# Altium PCB PCB.PcbDoc
Units mm, origin at the board's own origin, x right, y up, seen from the top; angles counter-clockwise.
Board outline 65 x 50 mm, 2 copper layers (Top Layer, Bottom Layer); 102 components, 99 nets, 372 pads, 9 vias.
Unrouted connection lines stored in the file: 148.
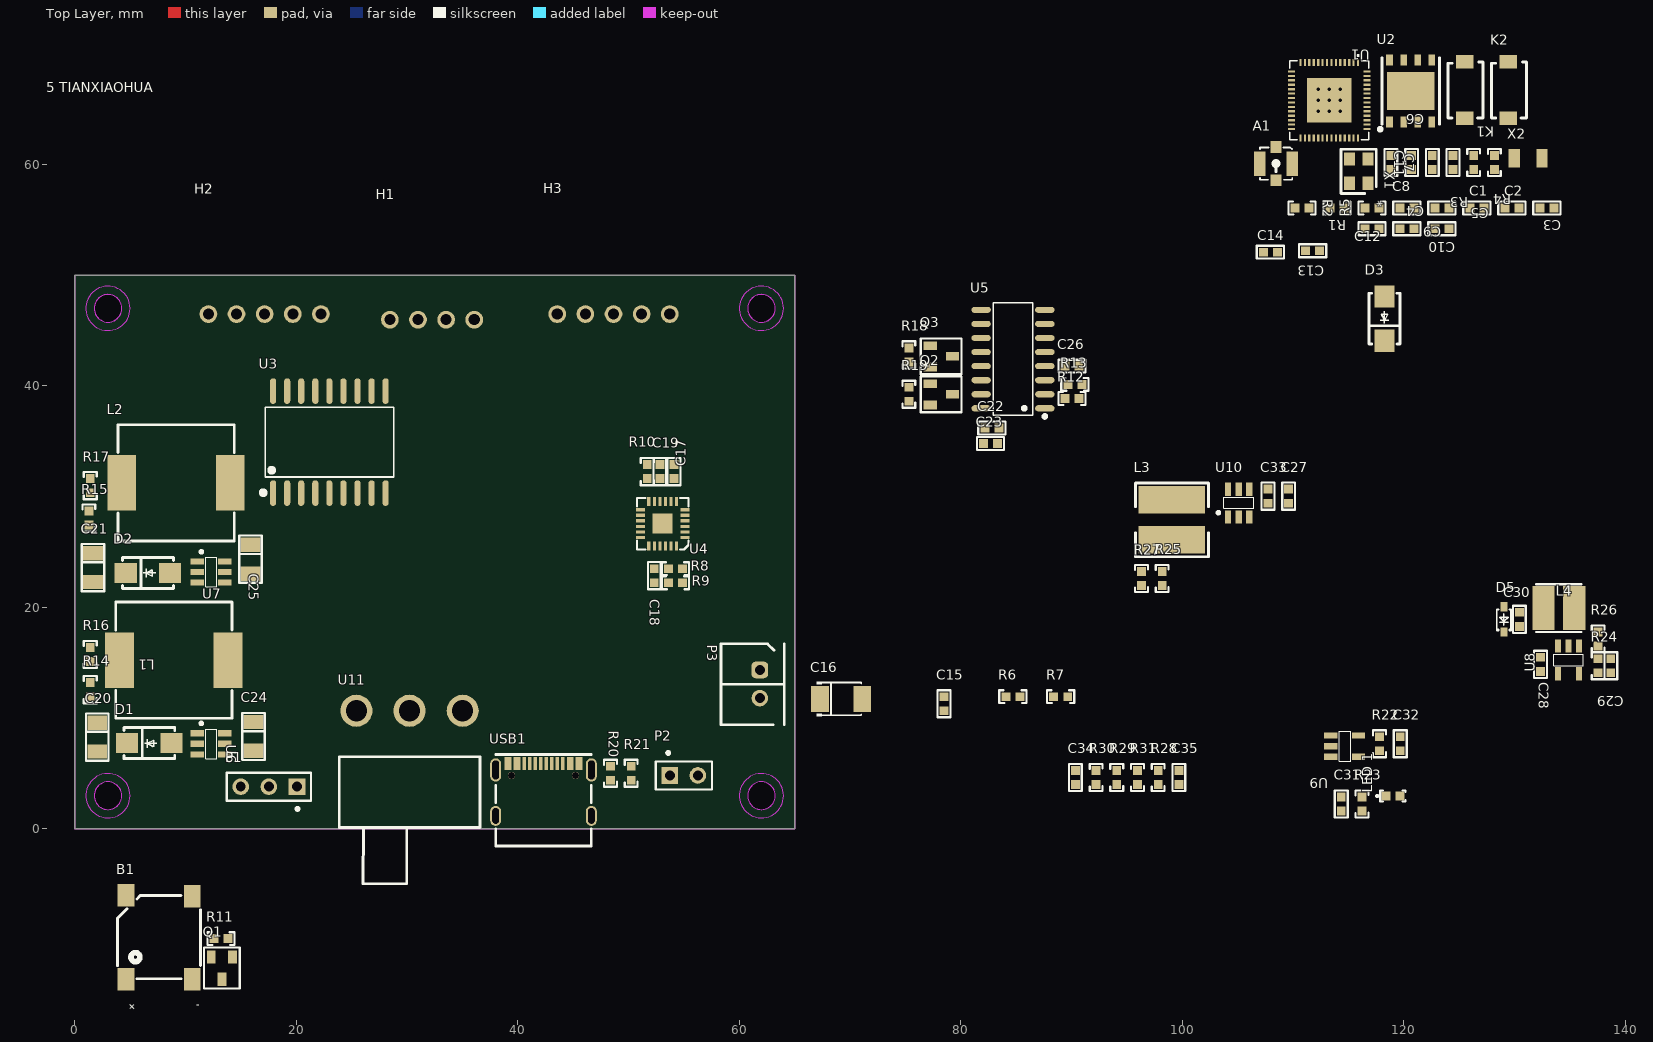
[diagram p0: Top Layer view]
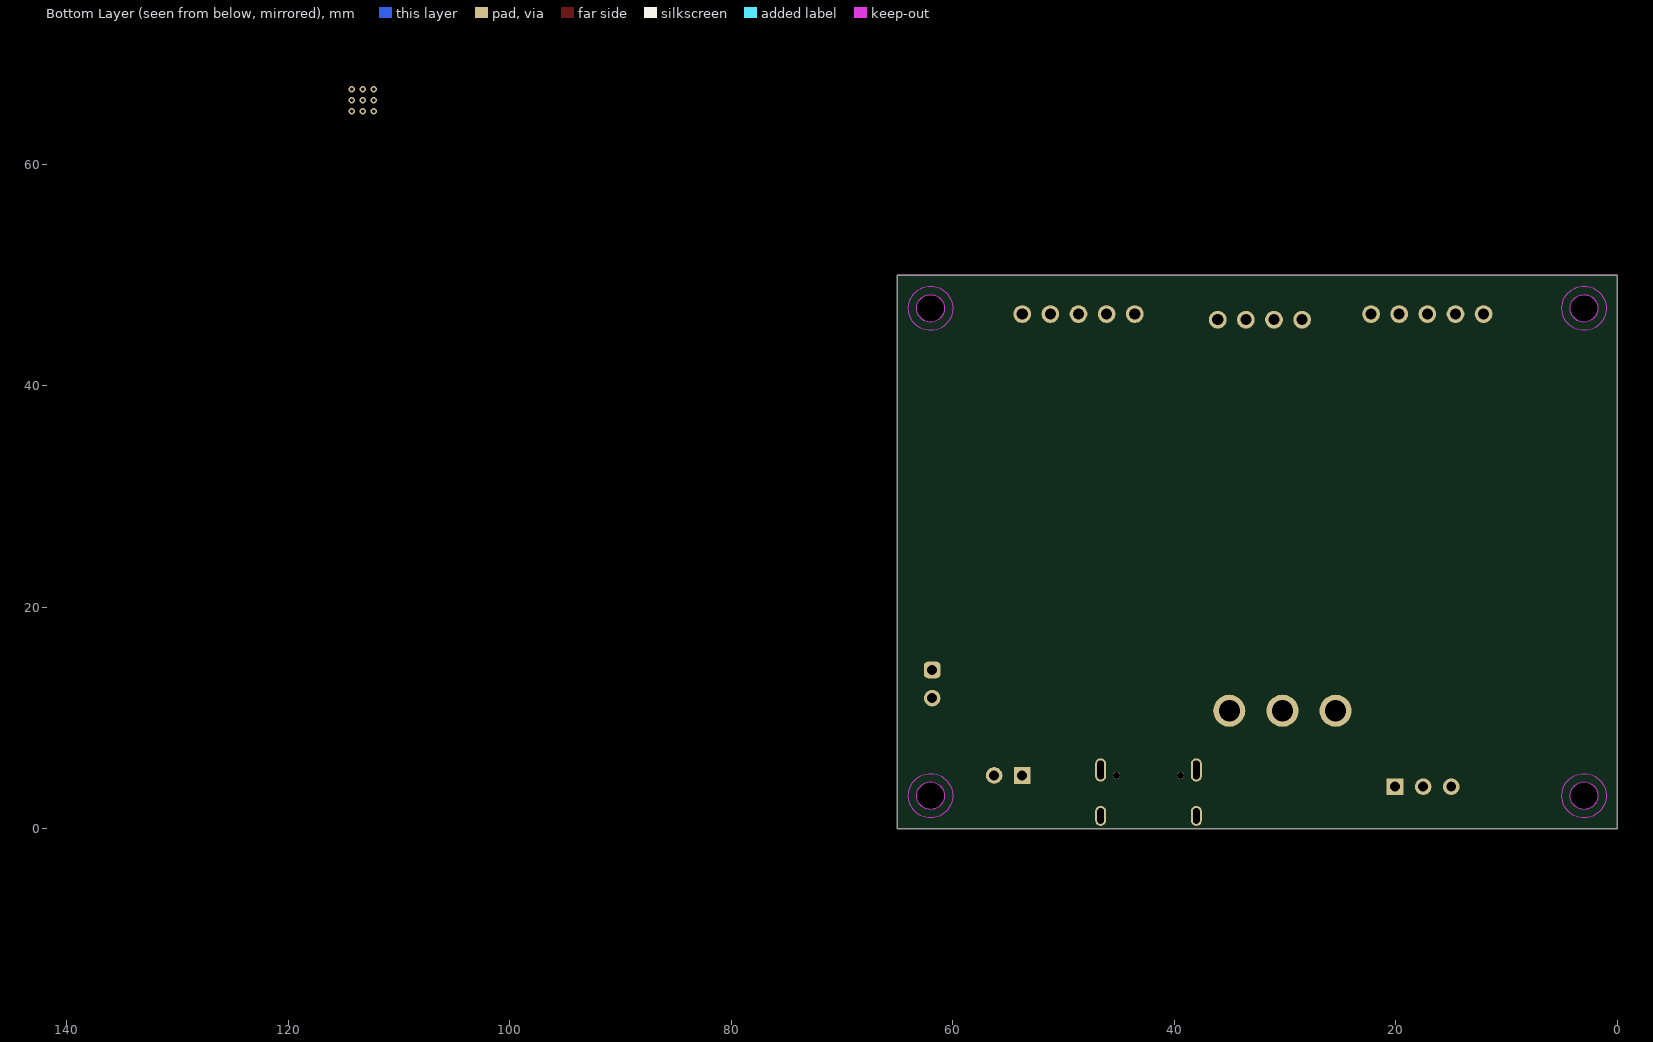
[diagram p1: Bottom Layer view, seen from below]

## Layer stack, top to bottom
Top Solder: solder mask 0.0102, Solder Resist, Dk 3.5
Top Layer: signal copper 0.0356
Dielectric 1: dielectric 0.32, FR-4, Dk 4.8
Bottom Layer: signal copper 0.0356
Bottom Solder: solder mask 0.0102, Solder Resist, Dk 3.5

## Board outline
0,0 0,50 65,50 65,0
cut-out: 60.75,47 ccw(c62,47) 62,45.75 ccw(c62,47) 63.25,47 ccw(c62,47) 62,48.25 ccw(c62,47)
cut-out: 60.75,3 ccw(c62,3) 62,1.75 ccw(c62,3) 63.25,3 ccw(c62,3) 62,4.25 ccw(c62,3)
cut-out: 60.75,3 ccw(c62,3) 62,1.75 ccw(c62,3) 63.25,3 ccw(c62,3) 62,4.25 ccw(c62,3)
cut-out: 60.75,3 ccw(c62,3) 62,1.75 ccw(c62,3) 63.25,3 ccw(c62,3) 62,4.25 ccw(c62,3)
cut-out: 1.75,3 ccw(c3,3) 3,1.75 ccw(c3,3) 4.25,3 ccw(c3,3) 3,4.25 ccw(c3,3)
cut-out: 1.75,47 ccw(c3,47) 3,45.75 ccw(c3,47) 4.25,47 ccw(c3,47) 3,48.25 ccw(c3,47)

## Design rules (kind name [scope] priority, off if disabled: settings)
Clearance [All] p1: gap=0.1 ignorepadtopadclearanceinfootprint=FALSE except(0: Arc-Hole Track-Hole SMDPad-Hole THPad-Hole Via-Hole Fill-Hole Poly-Hole Region-Hole Text-Hole; 0.102: Arc-Arc Arc-Track Arc-SMDPad Arc-THPad Track-Track Track-SMDPad Track-THPad SMDPad-SMDPad SMDPad-THPad THPad-THPad; 0.127: Arc-Via Track-Via SMDPad-Via SMDPad-Text THPad-Via Via-Via; 0.254: Arc-Text Track-Text THPad-Text Via-Text Fill-Text Poly-Text Region-Text Text-Text)
DiffPairsRouting [All] p1: maxlimit=0.254 minlimit=0.254 mostfreqgap=0.254 toplayer_minwidth=0.381 toplayer_maxwidth=0.381 toplayer_prefwidth=0.381 bottomlayer_minwidth=0.381 bottomlayer_maxwidth=0.381 bottomlayer_prefwidth=0.381 maxuncoupledlength=12.7
HoleSize [All] p1: absolutevalues=TRUE maxlimit=30 minlimit=0.025 maxpercent=80.000 minpercent=20.000
HoleToHoleClearance [All] p1: gap=0.152 allowstackedmicrovias=TRUE
MinimumSolderMaskSliver [All] p1: minsoldermaskwidth=0
PlaneClearance [All] p1: clearance=0.254
PlaneConnect [All] p1: planeconnectstyle=Direct reliefexpansion=0.508 reliefentries=4 reliefconductorwidth=0.254 reliefairgap=0.254
PolygonConnect [All] p1: connectstyle=Direct reliefconductorwidth=0.254 reliefentries=4 polygonreliefangle="90 Angle" airgapwidth=0.254
RoutingVias [All] p1: holewidth=0.711 width=1.27 viastyle="Through Hole" minholewidth=0.3 minwidth=0.5 maxholewidth=30 maxwidth=30
SilkToSilkClearance [All] p1: silktosilkclearance=0
SilkToSolderMaskClearance [IsPad] p1: minsilkscreentomaskgap=0 clearancetoexposedcopper=TRUE
SolderMaskExpansion [All] p1: expansion=0.102 istentingtop=FALSE
Width [All] p1: maxlimit=3 minlimit=0.1 preferedwidth=0.254
22 further rules are at their usual default settings.

## Classes and differential pairs
component class Sheet3-USB: C20 C21 C22 C23 C24 C25 C26 C27 C28 C29 C30 C31 C32 C33 C34 C35 D1 D2 D3 D5 L1 L2 L3 L4 "LED 1" P3 Q2 Q3 R12 R13 R14 R15 R16 R17 R18 R19 R20 R21 R22 R23 R24 R25 R26 R27 R28 R29 R30 R31 U5 U6 U7 U8 U9 U10 U11 USB1
component class Sheet2-control: B1 C15 C16 C17 C18 C19 H1 H2 H3 P1 P2 Q1 R6 R7 R8 R9 R10 R11 U3 U4
component class Sheet1-MCU: A1 C1 C2 C3 C4 C5 C6 C7 C8 C9 C10 C11 C12 C13 C14 K1 K2 R1 R2 R3 R4 R5 U1 U2 X1 X2
differential pair USB: +USB_P -USB_N
differential pair IO: +IO_P -IO_N
differential pair CH340: +CH340_P -CH340_N

## Components (designator, comment, footprint, x,y, rotation, side; value= is the part's Value field where it differs from the comment)
A1 "ANT-IPEX" IPEX-SMD_HC-RF-IPEX0303-01 108.458,60.071 r0 top
B1 "BUZZER1" BUZ-SMD_GSC7525RA 7.61,-9.779 r90 top
C1 "15pF" CC1608-0603 126.594,56.058 r180 top
C2 "15pF" CC1608-0603 129.753,56.058 r180 top
C3 "1uF" CC1608-0603 132.912,56.058 r0 top
C4 "100nF" CC1608-0603 123.435,56.058 r0 top
C5 "1uF" CC1608-0603 124.435,60.163 r270 top
C6 "100nF" CC1608-0603 122.566,60.163 r270 top
C7 "100nF" CC1608-0603 118.828,60.163 r90 top
C8 "12.5pF" CC1608-0603 120.276,56.058 r0 top
C9 "12.5pF" CC1608-0603 120.276,54.189 r0 top
C10 "100NF" CC1608-0603 123.435,54.189 r0 top
C11 "100NF" CC1608-0603 120.697,60.163 r270 top
C12 "1uF" CC1608-0603 117.117,54.189 r0 top
C13 "100NF" CC1608-0603 111.76,52.197 r180 top
C14 "1uF/NC" CC1608-0603 107.95,52.07 r0 top
C15 "100NF 50V" CC1608-0603 78.476,11.303 r90 top
C16 "100uF" TAN-B_3528 69.205,11.811 r0 top
C17 "100NF 50V" CC1608-0603 54.102,32.258 r270 top
C18 "2.2UF" CC1608-0603 52.324,22.86 r270 top
C19 "100NF" CC1608-0603 52.832,32.258 r270 top
C20 "22uF" TAN-A-1206 2.032,8.319 r270 top
C21 "22uF" TAN-A-1206 1.651,23.622 r270 top
C22 "1uF" CC1608-0603 82.804,36.195 r180 top
C23 "100NF" CC1608-0603 82.677,34.798 r180 top
C24 "22uF" TAN-A-1206 16.129,8.382 r270 top
C25 "22uF" TAN-A-1206 15.875,24.384 r270 top
C26 "100NF" CC1608-0603 90.043,41.783 r180 top
C27 "22uF" CC1608-0603 109.597,30.044 r90 top
C28 "10uF" CC1608-0603 132.334,14.859 r270 top
C29 "22PF" CC1608-0603 138.684,14.732 r270 top
C30 "10uF" CC1608-0603 130.429,18.923 r270 top
C31 "1uF" CC1608-0603 114.345,2.254 r90 top
C32 "100NF" CC1608-0603 119.671,7.692 r90 top
C33 "22uF" CC1608-0603 107.728,30.044 r90 top
C34 "100NF" CC1608-0603 90.342,4.644 r90 top
C35 "100NF" CC1608-0603 99.687,4.644 r90 top
D1 "SS34" "DO-214 AA" 6.731,7.747 r0 top
D2 "SS34" "DO-214 AA" 6.604,23.114 r0 top
D3 "SS34" "DO-214 AA" 118.237,46.069 r90 top
D5 "PESD3V3L1BA" SOD-323 129.032,18.923 r90 top
H1 "Header_4P_Curved" Header_2_54_4PW 36.068,45.974 r180 top
H2 "Header_5P_Curved" Header_2_54_5PW 22.225,46.482 r180 top
H3 "Header_5P_Curved" Header_2_54_5PW 53.721,46.482 r180 top
K1 "KEY 3*4" "KEY 3*4" 125.498,64.175 r90 top
K2 "KEY 3*4" "KEY 3*4" 129.435,64.175 r90 top
L1 "22UH" CDRH104R 8.943,15.24 r180 top
L2 "22UH" CDRH104R 9.144,31.242 r180 top
L3 "10uH" Inductor-6045 99.06,29.718 r0 top
L4 "1uH" Inductor-4018 133.985,19.939 r180 top
"LED 1" "LED 0603" "LED 0603" 119.013,2.971 r180 top
P1 "Header 3" HDR1X3 20.066,3.81 r180 top
P2 "Header 2" HDR1X2 53.721,4.826 r0 top
P3 "Header 2" HX2.54-2 61.849,14.351 r270 top
Q1 "SI2302" SOT-23 14.234,-11.557 r180 top
Q2 "S8050" SOT-23 77.228,40.193 r270 top
Q3 "S8050" SOT-23 77.228,43.622 r270 top
R1 "1.5K" CR1608-0603 113.958,56.058 r0 top
R2 "0R" CR1608-0603 110.799,56.058 r180 top
R3 "0R" CR1608-0603 126.304,60.163 r270 top
R4 "10K/NC" CR1608-0603 128.173,60.163 r270 top
R5 "10K" CR1608-0603 117.117,56.058 r0 top
R6 "2K" CR1608-0603 84.699,11.938 r0 top
R7 "2K" CR1608-0603 89.017,11.938 r0 top
R8 "2K" CR1608-0603 54.229,23.495 r0 top
R9 "2K" CR1608-0603 54.229,22.225 r0 top
R10 "4.7K" CR1608-0603 51.689,32.258 r270 top
R11 "33KR" CR1608-0603 13.208,-9.906 r180 top
R12 "470R" CR1608-0603 90.043,38.862 r0 top
R13 "470R" CR1608-0603 90.297,40.132 r0 top
R14 "33KR" CR1608-0603 1.397,12.573 r90 top
R15 "33KR" CR1608-0603 1.27,28.067 r90 top
R16 "2KR" CR1608-0603 1.397,15.748 r90 top
R17 "2KR" CR1608-0603 1.397,30.988 r90 top
R18 "12K/10K" CR1608-0603 75.311,42.799 r270 top
R19 "12K/10K" CR1608-0603 75.311,39.243 r90 top
R20 "5.1K" CR1608-0603 48.37,5.025 r270 top
R21 "5.1K" CR1608-0603 50.239,5.025 r90 top
R22 "1K" CR1608-0603 117.802,7.692 r90 top
R23 "2K" CR1608-0603 116.214,2.254 r90 top
R24 "100K" CR1608-0603 137.541,14.732 r90 top
R25 "78.7KR" CR1608-0603 98.18,22.614 r90 top
R26 "22.1K" CR1608-0603 137.541,17.145 r90 top
R27 "10KR" CR1608-0603 96.311,22.614 r90 top
R28 "10K" CR1608-0603 97.818,4.644 r90 top
R29 "10K" CR1608-0603 94.08,4.644 r90 top
R30 "10K" CR1608-0603 92.211,4.644 r90 top
R31 "10K" CR1608-0603 95.949,4.644 r90 top
U1 "ESP32-S3" QFN-56 113.265,65.787 r270 top
U2 "W25Q64JVPIQ" WSON-8 120.612,66.626 r0 top
U3 "ULN2803A-DWM" SOP-18 22.987,34.925 r0 top
U4 "MPU6050" "QFN24 - duplicate" 53.086,27.559 r180 top
U5 "CH340C" SOP-16 84.709,42.418 r90 top
U6 "MT3608" SOT23-6 12.319,7.747 r270 top
U7 "MT3608" SOT23-6 12.319,23.241 r270 top
U8 "SY8089A1AAC" SOT23-5 133.919,16.51 r0 top
U9 "TP4054" SOT23-5 113.412,6.512 r90 top
U10 "SX1308" SOT23-6 105.029,29.437 r0 top
U11 "HX SS12D10G4" SW-TH_3P-SS12D06 30.226,10.668 r0 top
USB1 "Tpye-c 16P" "TYPE-C 16P" 45.212,4.826 r0 top
X1 "3225_40M" XTAL-3225 115.074,58.288 r90 top
X2 "32.768kKHz" XTAL-3215 129.963,60.562 r0 top

## Footprints (in the part's own frame and the unit in brackets; to place one, negate y for a bottom-side part, rotate by r counter-clockwise, add the part's x,y. Pads: shape width x height; smd on the part's side, far side on the other; paste and mask are expansions set on the pad)
BUZ-SMD_GSC7525RA [mm]
  rect 2x1.5 smd paste+0 mask+0.051: 1(-3.795,2.98) 2(-3.795,-2.98) 3(3.705,-2.98) 3(3.795,2.98)
  silkscreen extent -3.75,-3.75 3.76,3.76, body extent -3.81,-3.81 3.69,3.69, height 2.5
CC1608-0603 [mm]
  rect 0.8x0.8 smd: 1(-0.635,0) 2(0.635,0)
  silkscreen extent -1.23,-0.58 1.23,0.58, body extent -0.8,-0.4 0.8,0.4, height 0.3
CDRH104R [mm]
  rect 2.6x5 smd paste+0 mask+0.05: 1(-4.9,0) 2(4.9,0)
  silkscreen extent -5.25,-5.25 5.25,5.25, body extent -5.19,-5.14 5.31,5.16, height 4
CR1608-0603 [mm]
  rect 0.8x0.8 smd: 1(-0.635,0) 2(0.635,0)
  silkscreen extent -1.23,-0.58 1.23,0.58, body extent -0.8,-0.4 0.8,0.4, height 0.45
"DO-214 AA" [mm] "SMB"
  rect 2x1.8 smd: 1(-2,0) 2(2,0)
  silkscreen extent -2.3,-1.4 2.3,1.4, body extent -2.83,-1.8 2.57,1.8, height 2.4
HDR1X2 [mm] "Connector; Header; 2 Position"
  rect 1.5x1.5 hole 0.9: 1(0,0)
  round 1.5 hole 0.9: 2(2.54,0)
  silkscreen extent -1.27,-1.27 3.81,2.17, body extent -1.27,-1.27 3.81,1.27, height 8.54
HDR1X3 [mm] "Connector; Header; 3 Position"
  rect 1.5x1.5 hole 0.9: 1(0,0)
  round 1.5 hole 0.9: 2(2.54,0) 3(5.08,0)
  silkscreen extent -1.27,-1.27 6.35,2.14, body extent -1.27,-1.27 6.35,1.27, height 8.54
Header_2_54_4PW [mm] "3P弯针"
  round 1.6 hole 1: 1(0,0) 2(2.54,0) 3(5.08,0) 4(7.62,0)
  body extent -1.27,-10.07 8.89,0.26, height 2.75
Header_2_54_5PW [mm] "6P弯针"
  round 1.6 hole 1: 1(0,0) 2(2.54,0) 3(5.08,0) 4(7.62,0) 5(10.16,0)
  body extent -1.27,-10.07 11.43,0.25, height 2.75
HX2.54-2 [mm] "两针白色插座（已加焊）"
  rrect50% 1.5x1.5 hole 0.9: 1(0,0)
  round 1.5 hole 0.9: 2(2.54,0)
  silkscreen extent -2.36,-3.5 4.94,2.2, body extent -2.48,-3.55 5.02,2.45, height 7
Inductor-4018 [mm]
  rect 2x4 smd paste+0 mask+0.051: 1(-1.397,0) 2(1.373,0)
  silkscreen extent -2.03,-2.16 2.03,2.16, body extent -2,-2 2,2, height 1.8
Inductor-6045 [mm] "电感"
  rect 6x2.5 smd: 1(0,0) 2(0,-3.6)
  silkscreen extent -3.3,-5.14 3.3,1.52, body extent -3,-4.93 3,1.37, height 4.5
IPEX-SMD_HC-RF-IPEX0303-01 [mm] "孔径2.0mm"
  rect 1x1.05 smd: 1(0,-1.5) 4(0,1.5)
  rect 1.05x2.2 smd: 2(1.475,0) 3(-1.475,0)
  silkscreen extent -1.45,-1.45 1.45,1.45, body extent -1.5,-1.55 1.5,1.55, height 1.25
"KEY 3*4" [mm]
  rect 1.2x1.6 smd: 1(0,0) 2(5.1,0)
  silkscreen extent 0,-1.65 5.08,1.52, body extent 0.25,-1.71 4.7,1.46, height 2.01
"LED 0603" [mm]
  rect 0.8x0.8 smd: 1(-0.635,0) 2(0.635,0)
  silkscreen extent -1.14,-0.51 1.48,0.51, body extent -0.8,-0.4 0.8,0.4, height 0.6
"QFN24 - duplicate" [mm]
  rect 0.8x0.3 smd: 1(-2,1.25) 2(-2,0.75) 3(-2,0.25) 4(-2,-0.25) 5(-2,-0.75) 6(-2,-1.25) 13(2,-1.25) 14(2,-0.75) 15(2,-0.25) 16(2,0.25) 17(2,0.75) 18(2,1.25)
  rect 1.8x1.8 smd: 1(0.005,0)
  rect 0.3x0.8 smd: 7(-1.25,-2) 8(-0.75,-2) 9(-0.25,-2) 10(0.25,-2) 11(0.75,-2) 12(1.25,-2) 19(1.25,2) 20(0.75,2) 21(0.25,2) 22(-0.25,2) 23(-0.75,2) 24(-1.25,2)
  silkscreen extent -2.32,-2.32 2.32,2.32, body extent -2,-2 2.01,2, height 0.9
QFN-56 [mm]
  rect 0.665x0.2 smd paste-100 mask+0.051: 1(-3.407,2.6) 2(-3.407,2.2) 3(-3.407,1.8) 4(-3.407,1.4) 5(-3.407,1) 6(-3.407,0.6) 7(-3.407,0.2) 8(-3.407,-0.2) 9(-3.407,-0.6) 10(-3.407,-1) 11(-3.407,-1.4) 12(-3.407,-1.8) 13(-3.407,-2.2) 14(-3.407,-2.6) 29(3.408,-2.6) 30(3.408,-2.2) 31(3.408,-1.8) 32(3.408,-1.4) 33(3.408,-1) 34(3.408,-0.6) 35(3.408,-0.2) 36(3.408,0.2) 37(3.408,0.6) 38(3.408,1) 39(3.408,1.4) 40(3.408,1.8) 41(3.408,2.2) 42(3.408,2.6)
  rect 0.2x0.665 smd paste-100 mask+0.051: 15(-2.6,-3.407) 16(-2.2,-3.407) 17(-1.8,-3.407) 18(-1.4,-3.407) 19(-1,-3.407) 20(-0.6,-3.407) 21(-0.2,-3.407) 22(0.2,-3.407) 23(0.6,-3.407) 24(1,-3.407) 25(1.4,-3.407) 26(1.8,-3.407) 27(2.2,-3.407) 28(2.6,-3.407) 43(2.6,3.408) 44(2.2,3.408) 45(1.8,3.408) 46(1.4,3.408) 47(1,3.408) 48(0.6,3.408) 49(0.2,3.408) 50(-0.2,3.408) 51(-0.6,3.408) 52(-1,3.408) 53(-1.4,3.408) 54(-1.8,3.408) 55(-2.2,3.408) 56(-2.6,3.408)
  rect 4x4 smd paste-100 mask+0.051: 57(0,0)
  silkscreen extent -4.11,-3.58 3.58,3.58, body extent -3.51,-3.52 3.51,3.49, height 0.9
SOD-323 [mm]
  rect 0.83x0.63 smd paste+0 mask+0.05: 1(-1.14,0) 2(1.14,0)
  silkscreen extent -1.02,-0.64 0.89,0.64, body extent -1.27,-0.68 1.33,0.68, height 1.1
SOP-16 [mm]
  oval 0.56x1.745 smd: 1(-4.445,-2.873) 2(-3.175,-2.873) 3(-1.905,-2.873) 4(-0.635,-2.873) 5(0.635,-2.873) 6(1.905,-2.873) 7(3.175,-2.873) 8(4.445,-2.873) 9(4.445,2.873) 10(3.175,2.873) 11(1.905,2.873) 12(0.635,2.873) 13(-0.635,2.873) 14(-1.905,2.873) 15(-3.175,2.873) 16(-4.445,2.873)
  silkscreen extent -5.33,-3.02 5.08,1.77, body extent -4.99,-3.09 4.99,3.14, height 1.59
SOP-18 [mm]
  oval 0.56x2.31 smd paste+0 mask+0.051: 1(-5.08,-4.605) 2(-3.81,-4.605) 3(-2.54,-4.605) 4(-1.27,-4.605) 5(0,-4.605) 6(1.27,-4.605) 7(2.54,-4.605) 8(3.81,-4.605) 9(5.08,-4.605) 10(5.08,4.605) 11(3.81,4.605) 12(2.54,4.605) 13(1.27,4.605) 14(0,4.605) 15(-1.27,4.605) 16(-2.54,4.605) 17(-3.81,4.605) 18(-5.08,4.605)
  silkscreen extent -6.17,-4.77 5.8,3.15, body extent -5.78,-5.09 5.78,5.22, height 2.61
SOT23-5 [mm] "适用于MIC5205"
  rect 0.55x1.2 smd: 1(1.905,0) 2(0.955,0) 3(0.005,0) 4(0.005,-2.5) 5(1.905,-2.5)
  silkscreen extent -0.38,-1.78 2.29,-0.76, body extent -0.6,-2.82 2.5,0.38, height 1.45
SOT23-6 [mm]
  rect 0.55x1.2 smd: 1(-0.889,-1.27) 2(0.061,-1.27) 3(1.011,-1.27) 4(1.011,1.23) 5(0.061,1.23) 6(-0.889,1.23)
  silkscreen extent -1.9,-1.02 1.4,0.51, body extent -1.39,-1.4 1.51,1.4, height 1.45
SOT-23 [mm]
  rect 0.8x1.2 smd: 1(0,0) 2(1.905,0) 3(0.95,2.02)
  silkscreen extent -0.66,-0.84 2.57,2.84, body extent -0.61,-0.23 2.39,2.27, height 1.05
SW-TH_3P-SS12D06 [mm]
  round 2.9 hole 1.9 paste+0 mask+0.051: 1(-4.8,0) 2(0,0) 3(4.8,0)
  silkscreen extent -6.35,-15.62 6.35,-4.15, body extent -6.35,-15.68 6.35,-4.19, height 6.7
TAN-A-1206 [mm]
  rect 1.3x1.8 smd: 1(-1.27,0) 2(1.333,0)
  silkscreen extent -2.1,-1.02 2.16,1.02, body extent -1.66,-0.8 1.54,0.8, height 1.6
TAN-B_3528 [mm] "钽电容小封装"
  rect 1.607x2.376 smd: 1(-1.926,-0.075) 2(1.897,-0.075)
  silkscreen extent -2.22,-1.63 1.81,1.48, body extent -1.98,-1.59 1.72,1.34, height 2.03
"TYPE-C 16P" [mm]
  oval 1x2.099 hole 0.6 slot 1.7 at 90 deg: 1(-7.21,0.5) 2(1.43,0.5)
  oval 1x1.799 hole 0.6 slot 1.4 at 90 deg: 3(-7.21,-3.65) 4(1.43,-3.65)
  rect 0.6x1.15 smd: A1B12(-6.09,1.075) A4B9(-5.29,1.075) B1A12(0.31,1.075) B4A9(-0.49,1.075)
  rect 0.3x1.15 smd: A5(-4.14,1.075) A6(-3.14,1.075) A7(-2.64,1.075) A8(-1.64,1.075) B5(-1.14,1.075) B6(-2.14,1.075) B7(-3.64,1.075) B8(-4.64,1.075)
  round 0.65 hole 0.65 unplated: ""(-5.78,0) ""(0,0)
  silkscreen extent -7.21,-6.37 1.43,1.89, body extent -7.31,-6 1.63,0.9, height 3.18
WSON-8 [mm]
  rect 0.6x1 smd paste+0 mask+0.051: 1(-1.905,-2.8) 2(-0.635,-2.8) 3(0.635,-2.8) 4(1.905,-2.8) 5(1.905,2.8) 6(0.635,2.8) 7(-0.635,2.8) 8(-1.905,2.8)
  rect 4.3x3.4 smd paste+0 mask+0.051: 9(0,0)
  silkscreen extent -2.9,-3.6 2.6,3, body extent -2.5,-3 2.5,3, height 0.7
XTAL-3215 [mm]
  rect 1x1.65 smd: 1(0,0) 2(2.5,0)
  body extent -0.33,-0.75 2.87,0.75, height 0.8
XTAL-3225 [mm]
  rect 1.2x1 smd: 1(0,-1.7) 2(2.2,-1.7) 3(2.2,0) 4(0,0)
  silkscreen extent -0.91,-2.44 3.07,0.76, body extent -0.43,-2.15 2.77,0.35, height 0.61

## Part data
A1: "贴片封装的天线 封装类型为IPEX"
B1: "2700Hz", Manufacturer=INGHAi(赢海), Manufacturer Part=GSC7525RA-16R2700, Contributor=LCSC, nameAlias=Value, spicePre=B, spiceSymbolName=GSC7525RA-16R2700, Supplier=LCSC, Supplier Part=C255313
C1 C2 C3 C4 C5 C6 C7 C8 C9 C10 C11 C12 C13 C14 C15 C17 C18 C19 C22 C23 C26 C28 C29 C30 C31 C32 C33 C34 C35: library part "Cap Chip 0603", "0603封装的电容", Published=8-Jun-2000, Publisher="Altium Limited", Revision="July-2002: Re-released for DXP Platform."
C16: library part "CAP TAN-B-3528", "钽电容"
C20 C21 C24 C25: library part "CAP TAN-A-1206", "钽电容"
C27: library part "Chip capacitor", "贴片电容"
D1 D2 D3: "肖特基二极管"
D5: "SOD-323 3.3V 双向ESD防静电二极管保护芯片", JLCPCB Part Class="Extended Part", Manufacturer=MDD, Manufacturer Part=SMAJ6.5CA, spicePre=D, spiceSymbolName=SMAJ6.5CA-C110041, Supplier=LCSC, Supplier Part=C110041
H1: "弯的4P排针"
H2 H3: "弯的6P排针"
K1 K2: "轻触开关按键"
L1 L2: library part Inductor-CDRH104R, "贴片电感 CDRH104R 封装"
L3: library part Inductor-6045, "6045封装 线绕SMD功率电感"
L4: library part Inductor-4018, "贴片电感 1206封装"
P1: "Header, 3-Pin", LatestRevisionDate=17-Jul-2002, LatestRevisionNote="Re-released for DXP Platform.", Publisher="Altium Limited"
P2 P3: "Header, 2-Pin", LatestRevisionDate=17-Jul-2002, LatestRevisionNote="Re-released for DXP Platform.", Publisher="Altium Limited"
Q1: "N沟道  / 漏源电压(Vdss) 20V  / 连续漏极电流(Id) 2.8A  / 功率(Pd) 900mW  / 导通电阻(RDS(on)@Vgs,Id) 55mΩ@4.5V,2.8A  / 阈值电压(Vgs(th)@Id) 1.2V@250uA  / 输入电容(Ciss@Vds) 260pF@10V", JLCPCB Part Class="Extended Part", Manufacturer=TWGMC(台湾迪嘉), Manufacturer Part=SI2306, Contributor=LCSC, spicePre=Q, spiceSymbolName=SI2306_C727154, Supplier=LCSC, Supplier Part=C727154
Q2 Q3: Manufacturer=SALLTECH(萨瑞), Contributor=lcsc, Manufacturer Part=S8050, spicePre=Q, spiceSymbolName=S8050_C3027096, Supplier=LCSC, Supplier Part=C3027096
R1 R2 R3 R4 R5 R6 R7 R8 R9 R10 R12 R13 R18 R19 R20 R21 R22 R23 R24 R26 R28 R29 R30 R31: library part "Resistor Chip 0603", "0603封装电阻", Published=8-Jun-2000, Publisher="Altium Limited", Revision="July-2002: Re-released for DXP Platform."
R11 R14 R15 R16 R17 R25 R27: library part "Chip resistor", "贴片电阻"
U1: JLCPCB Part Class="Extended Part", Manufacturer=ESPRESSIF(乐鑫), Contributor=LCSC, Manufacturer Part=ESP32-S3, spicePre=U, spiceSymbolName=ESP32-S3, Supplier=LCSC, Supplier Part=C2913192
U2: library part W25Q128JVPIQ, JLCPCB Part Class="Extended Part", Manufacturer=WINBOND(华邦), Contributor=LCSC, Manufacturer Part=W25Q128JVPIQ, spicePre=U, spiceSymbolName=W25Q128JVPIQ, Supplier=LCSC, Supplier Part=C2803379
U3: library part ULN2803A, "UMW ULN2803A SOP-18 达林顿阵列功率驱动集成电路芯片", JLCPCB Part Class="Extended Part", Manufacturer=HGC(华冠), Manufacturer Part=ULN2803ADWM/TR, Contributor=lcsc, spicePre=U, spiceSymbolName=ULN2803ADWM/TR, Supplier=LCSC, Supplier Part=C2683132
U4: "陀螺仪"
U5: JLCPCB Part Class="Extended Part", Manufacturer=WCH(南京沁恒), Manufacturer Part=CH340C, spicePre=U, spiceSymbolName=CH340C, Supplier=LCSC, Supplier Part=C84681
U6 U7: "• 2V to 24V Input Voltage / • 1.2MHz Fixed Switching Frequency / • Internal 4A Switch Current Limit / • Adjustable Output Voltage / • Internal Compensation / • Up to 28V Output VoltagE"
U8: "SY8089A1是一种高效率的1.5MHz同步降压DC/DC稳压器，能够提供高达输出电流2A。它可以在2.5V到5.5V的宽输入电压范围内工作，集成了主开关和同步开关，具有极低的RDS(ON)，最大限度地减少了导通损耗。 / 输出电压纹波小，外接电感小，电容器尺寸小 / 1.5MHz开关频率。"
U9: "迷你充电IC SOT-23-5"
U10: "SOT23-6 升压芯片"
U11: library part SW-TH_3P-SS12D06, BOM_JLCPCB Part Class="Extended Part", BOM_Manufacturer=hanxia(韩下), BOM_Manufacturer Part="HX SS12D10G4", BOM_Supplier=LCSC, BOM_Supplier Part=C5149841, Contributor=lcsc, link=https://atta.szlcsc.com/upload/public/pdf/source/20220907/2020D7183ED16DD6E2B9F5A13FB144CF.pdf, spicePre=U, spiceSymbolName="HX SS12D10G4"
USB1: "16P 封装的TYPE -c接口 4固定插脚 双向"
X1: library part "XTAL 3225", "3225封装的晶振"
X2: library part "XTAL 3215 32.768kKHz", "3215封装的时钟晶振"

## Via types
v1: diameter 0.61, hole 0.305, Top Layer to Bottom Layer, 9 vias

## Nets (pads, with @x,y where several pads share a name; then routed paths per layer and width w, separated by ;. In a path a pad name is that pad's centre, name@x,y a point inside that pad or via, vN(x,y) a via of type N, cw(c..) or ccw(c..) an arc to the next point about the centre after c; other vN are vias at no path point)
3.3V: B1.1 C3.2 C4.2 C5.2 C6.2 C7.2 C10.2 C11.2 C15.2 C17.2 C29.2 C30.2 D5.1 H1.1 L4.2 R1.1 R4.2 R5.2 R6.1 R7.1 R8.1 R9.1 R10.1 R24.1 U1.2 U1.3 U1.20 U1.46 U1.55 U1.56 U4.8 U4.13
5V: C27.1 C28.2 D3.1 R25.2 U8.4
ADC_BAT: C35.2 R29.1 R31.2
ADC_LX: U1.7
ADC_LY: U1.8
ADC_RX: U1.9
ADC_RY: U1.10
BAT: C24.2 C25.2 C33.2 L1.1 L2.1 L3.1 R29.2 U6.5 U7.5 U10.5 U11.3
BEEP: Q1.1 R11.1
CH340_N: U5.6
CH340_P: U5.5
CHIP_PU: C14.2 K2.1 R4.1 U1.4
DTR: Q3.2 R18.1 U5.13
EN: U6.4 U7.4 U8.1 U10.4
ESP32_N: R3.2
ESP32_P: R2.2
GND: A1.2 A1.3 A1.4 C1.1 C2.1 C3.1 C4.1 C5.1 C6.1 C7.1 C8.1 C9.1 C10.1 C11.1 C12.1 C13.1 C14.1 C15.1 C16.2 C17.1 C18.2 C19.1 C20.1 C21.1 C22.1 C23.1 C24.1 C25.1 C26.1 C27.2 C28.1 C30.1 C31.1 C32.1 C33.1 C34.1 C35.1 D5.2 H1.2 K1.2 K2.2 P1.1 P2.2 P3.1 Q1.2 R11.2 R16.2 R17.2 R20.1 R21.1 R23.2 R26.2 R27.1 R30.1 R31.1 U1.57 U2.4 U2.9 U3.9 U4.1 U4.6 U4.7 U4.9 U4.11 U4.18 U5.1 U6.2 U7.2 U8.2 U9.2 U10.2 USB1.1 USB1.2 USB1.3 USB1.4 USB1.A1B12 USB1.B1A12 X1.2 X1.4
  other v1: 112.265,64.787 113.265,64.787 114.265,64.787 112.265,65.787 113.265,65.787 114.265,65.787 112.265,66.787 113.265,66.787 114.265,66.787
GPIO0: K1.1 R5.1 U1.5
IIC2_SCL: R8.2 U4.23
IIC2_SDA: R9.2 U4.24
IIC_SCL: U1.42
IIC_SDA: U1.43
IO_N: R3.1 U1.25
IO_P: R1.2 R2.1 U1.26
KEY_CHA: U1.13
KEY_down: U1.40
KEY_DOWN_1: U1.6
KEY_DOWN_2: U1.19
KEY_DOWN_3: U1.27
KEY_left: U1.39
KEY_right: U1.38
KEY_up: U1.41
KEY_USB: C34.2 R28.1 R30.2
LCD_RS: U1.51
M1_A: U3.1
M1_B: U3.2
M1_C: U3.3
M1_D: U3.4
M2_A: U3.5
M2_B: U3.6
M2_C: U3.7
M2_D: U3.8
MPU_INT: R10.2 U4.12
NetA1_1: A1.1 U1.1
NetB1_2: B1.2 Q1.3
NetC18_1: C18.1 U4.20
NetC19_2: C19.2 U4.10
NetC26_2: C26.2 U5.4
NetC29_1: C29.1 R24.2 R26.1 U8.5
NetD1_2: D1.2 L1.2 U6.1
NetD2_2: D2.2 L2.2 U7.1
NetD4_2: L3.2 U10.1
NetH2_1: H2.1 U3.15
NetH2_2: H2.2 U3.16
NetH2_3: H2.3 U3.17
NetH2_4: H2.4 U3.18
NetH3_1: H3.1 U3.11
NetH3_2: H3.2 U3.12
NetH3_3: H3.3 U3.13
NetH3_4: H3.4 U3.14
NetL4_1: L4.1 U8.3
"NetLED 1_1": "LED 1.1" R22.2
"NetLED 1_2": "LED 1.2" U9.1
NetP3_2: P3.2 U9.3 U11.1 U11.2
NetQ2_1: Q2.1 R18.2
NetQ3_1: Q3.1 R19.2
NetR12_1: R12.1 U5.2
NetR13_1: R13.1 U5.3
NetR14_2: R14.2 R16.1 U6.3
NetR15_2: R15.2 R17.1 U7.3
NetR20_2: R20.2 USB1.A5
NetR21_2: R21.2 USB1.B5
NetR23_1: R23.1 U9.5
NetR25_1: R25.1 R27.2 U10.3
PWR_M1: C20.2 D1.1 P2.1 R14.1
PWR_M2: C16.1 C21.2 D2.1 H2.5 H3.5 R15.1 U3.10
RTS: Q2.2 R19.1 U5.14
RXD: P1.3
SPI2_CLK: U1.17
SPI2_CS0: U1.12
SPI2_MISO: U1.18
SPI2_MOSI: U1.16
SPICLK: U1.33 U2.6
SPICS0: U1.32 U2.1
SPID: U1.35 U2.5
SPIHD: U1.30 U2.7
SPIQ: U1.34 U2.2
SPIWP: U1.31 U2.3
TXD: P1.2
U0RXD: U1.50
U0TXD: U1.49
"USB 5V": C22.2 C23.2 C31.2 C32.2 D3.2 R22.1 R28.2 U5.16 U9.4 USB1.A4B9 USB1.B4A9
USB_N: USB1.A7 USB1.B7
USB_P: USB1.A6 USB1.B6
VDD_SPI: C12.2 C13.2 U1.29 U2.8
XH32_N: C9.2 U1.22 X2.2
XH32_P: C8.2 U1.21 X2.1
XH_N: C2.2 U1.53 X1.3
XH_P: C1.2 U1.54 X1.1
pads on no net: B1.3 H1.3 H1.4 Q2.3 Q3.3 R6.2 R7.2 R12.2 R13.2 U1.11 U1.14 U1.15 U1.23 U1.24 U1.28 U1.36 U1.37 U1.44 U1.45 U1.47 U1.48 U1.52 U4.2 U4.3 U4.4 U4.5 U4.14 U4.15 U4.16 U4.17 U4.19 U4.21 U4.22 U5.7 U5.8 U5.9 U5.10 U5.11 U5.12 U5.15 U6.6 U7.6 U10.6 USB1. USB1.A8 USB1.B8

## Keep-outs
Keep-Out Layer:
  circle w0.1: c3,3 r2
  circle w0.1: c62,47 r1.25
  circle w0.1: c62,47 r2
  circle w0.1: c62,3 r1.25
  circle w0.1: c62,3 r2
  circle w0.1: c3,3 r1.25
  circle w0.1: c3,47 r1.25
  circle w0.1: c3,47 r2
  lines w0.1: 0,0 65,0 65,50 0,50 0,0

## Silkscreen, mask and mechanical layers (free items; w line width, h text height)
Top Overlay:
  text "FOC DRIVER V0.4" at -4.191,72.665 h2
  text "2024.5 TIANXIAOHUA" at -6.097,66.183 h1.52
Top Solder:
  circle w1: c3,3 r1.5
  circle w1: c62,47 r1.5
  circle w1: c62,3 r1.5
  circle w1: c3,47 r1.5
Bottom Solder:
  circle w1: c3,3 r1.5
  circle w1: c62,47 r1.5
  circle w1: c62,3 r1.5
  circle w1: c3,47 r1.5

## Dimensions
3,4.5 to 0,0 on Mechanical 1
0,50 to 65,50 on Mechanical 1
0,0 to 0,50 on Mechanical 1

## Text inside footprints (layer, text, board x,y; h text height)
B1: Top Overlay "-" at 11.262,-15.407 h1.14 r180; Top Overlay "+" at 4.542,-16.132 h1.14 r315
X1: Top Overlay "*" at 118.757,56.129 h1.52 r90